# Altium PCB PCB3.PcbDoc (part 1 of 4)
Units mil, origin at the board's own origin, x right, y up, seen from the top; angles counter-clockwise.
Board outline 6000 x 4000 mil, 2 copper layers (Top Layer, Bottom Layer); 365 components, 395 nets, 1535 pads, 0 vias.
Unrouted connection lines stored in the file: 834.
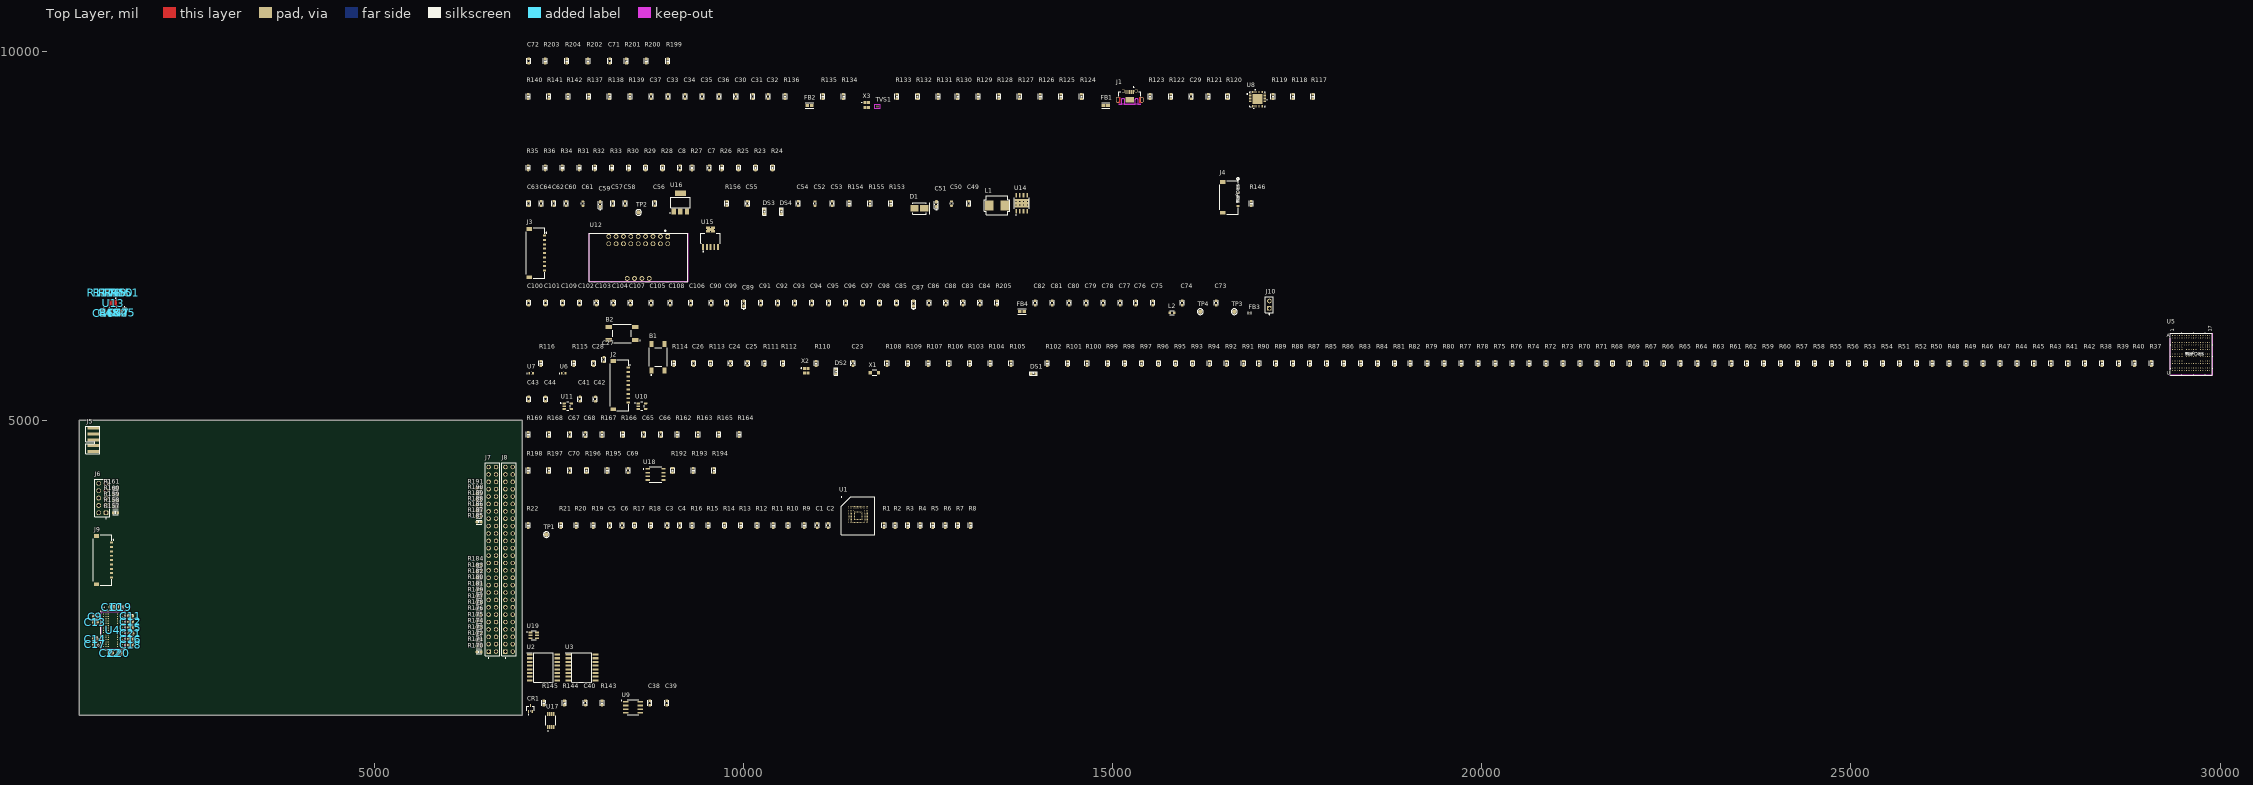
[diagram p0: Top Layer view]
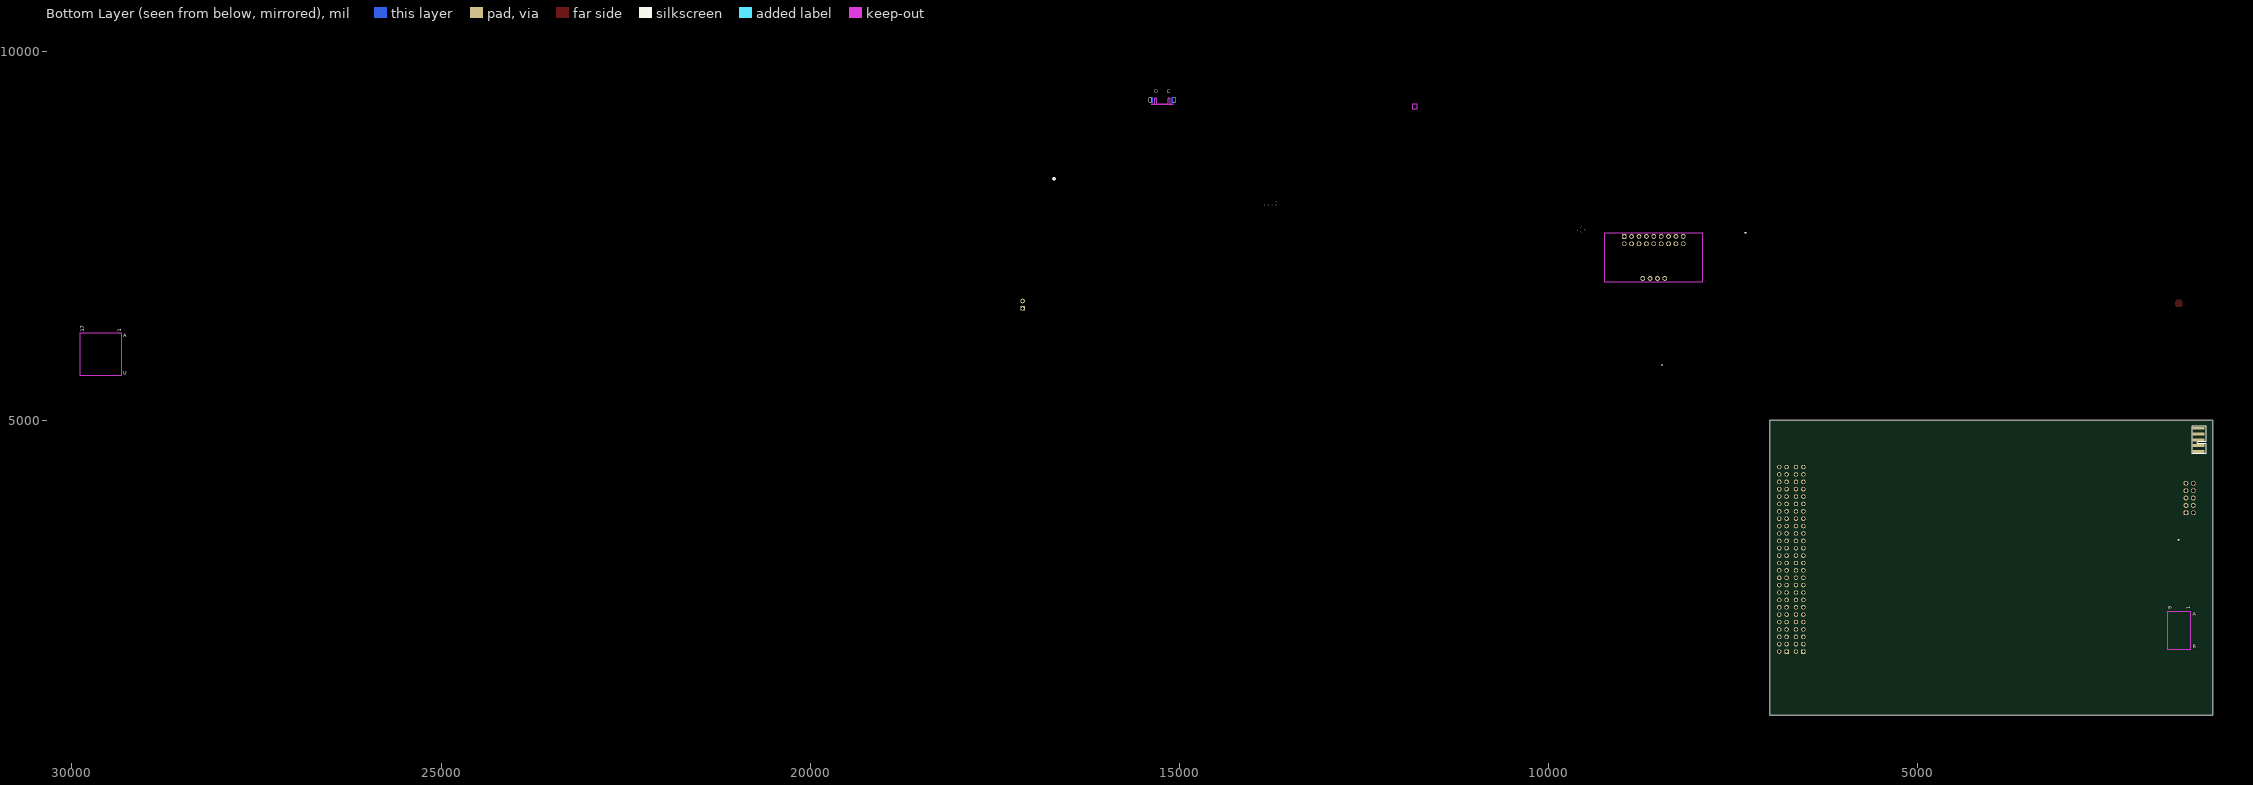
[diagram p1: Bottom Layer view, seen from below]

## Layer stack, top to bottom
Top Solder: solder mask 0.4, Solder Resist, Dk 3.5
Top Layer: signal copper 1.4
Dielectric 1: dielectric 12.6, FR-4, Dk 4.8
Bottom Layer: signal copper 1.4
Bottom Solder: solder mask 0.4, Solder Resist, Dk 3.5

## Board outline
1000,1000 7000,1000 7000,5000 1000,5000

## Design rules (kind name [scope] priority, off if disabled: settings)
Clearance [All] p1: gap=10 ignorepadtopadclearanceinfootprint=FALSE
DiffPairsRouting [All] p1: maxlimit=10 minlimit=10 mostfreqgap=10 toplayer_minwidth=15 toplayer_maxwidth=15 toplayer_prefwidth=15 bottomlayer_minwidth=15 bottomlayer_maxwidth=15 bottomlayer_prefwidth=15 maxuncoupledlength=500
MatchedLengths "Schematic Matched Net Lengths_21" [InNetClass('SDRAM_A[0..11]')] p1: tolerance=100 checknetsindiffpair=FALSE checkdiffpairvsdiffpair=TRUE checkxsignals=TRUE checkothers=TRUE
MatchedLengths "Schematic Matched Net Lengths_20" [InNet('SDIO1_CMD')] p2: tolerance=100 checknetsindiffpair=FALSE checkdiffpairvsdiffpair=TRUE checkxsignals=TRUE checkothers=TRUE
MatchedLengths "Schematic Matched Net Lengths_17" [InNet('QSPI_BK2_IO1')] p3: tolerance=100 checknetsindiffpair=FALSE checkdiffpairvsdiffpair=TRUE checkxsignals=TRUE checkothers=TRUE
MatchedLengths "Schematic Matched Net Lengths_16" [InNet('QSPI_BK2_IO3')] p4: tolerance=100 checknetsindiffpair=FALSE checkdiffpairvsdiffpair=TRUE checkxsignals=TRUE checkothers=TRUE
MatchedLengths "Schematic Matched Net Lengths_15" [InNet('QSPI_BK2_NCS')] p5: tolerance=100 checknetsindiffpair=FALSE checkdiffpairvsdiffpair=TRUE checkxsignals=TRUE checkothers=TRUE
MatchedLengths "Schematic Matched Net Lengths_13" [InNet('QSPI_BK2_IO0')] p6: tolerance=100 checknetsindiffpair=FALSE checkdiffpairvsdiffpair=TRUE checkxsignals=TRUE checkothers=TRUE
MatchedLengths "Schematic Matched Net Lengths_11" [InNet('QSPI_BK1_IO1')] p7: tolerance=100 checknetsindiffpair=FALSE checkdiffpairvsdiffpair=TRUE checkxsignals=TRUE checkothers=TRUE
MatchedLengths "Schematic Matched Net Lengths_10" [InNetClass('SDIO1_D[0..7]')] p8: tolerance=100 checknetsindiffpair=FALSE checkdiffpairvsdiffpair=TRUE checkxsignals=TRUE checkothers=TRUE
MatchedLengths "Schematic Matched Net Lengths_9" [InNet('QSPI_BK1_IO2')] p9: tolerance=100 checknetsindiffpair=FALSE checkdiffpairvsdiffpair=TRUE checkxsignals=TRUE checkothers=TRUE
MatchedLengths "Schematic Matched Net Lengths_8" [InNet('SDIO1_CK')] p10: tolerance=100 checknetsindiffpair=FALSE checkdiffpairvsdiffpair=TRUE checkxsignals=TRUE checkothers=TRUE
MatchedLengths "Schematic Matched Net Lengths_7" [InNet('QSPI_BK1_IO3')] p11: tolerance=100 checknetsindiffpair=FALSE checkdiffpairvsdiffpair=TRUE checkxsignals=TRUE checkothers=TRUE
MatchedLengths "Schematic Matched Net Lengths_6" [InNet('QSPI_BK1_NCS')] p12: tolerance=100 checknetsindiffpair=FALSE checkdiffpairvsdiffpair=TRUE checkxsignals=TRUE checkothers=TRUE
MatchedLengths "Schematic Matched Net Lengths_5" [InNet('QSPI_BK2_IO2')] p13: tolerance=100 checknetsindiffpair=FALSE checkdiffpairvsdiffpair=TRUE checkxsignals=TRUE checkothers=TRUE
MatchedLengths "Schematic Matched Net Lengths_4" [InNet('QSPI_CLK')] p14: tolerance=100 checknetsindiffpair=FALSE checkdiffpairvsdiffpair=TRUE checkxsignals=TRUE checkothers=TRUE
MatchedLengths "Schematic Matched Net Lengths_3" [InNet('QSPI_BK1_IO0')] p15: tolerance=100 checknetsindiffpair=FALSE checkdiffpairvsdiffpair=TRUE checkxsignals=TRUE checkothers=TRUE
PolygonConnect [All] p1: connectstyle=Relief reliefconductorwidth=10 reliefentries=4 polygonreliefangle="90 Angle" airgapwidth=10
RoutingVias [All] p1: holewidth=28 width=50 viastyle="Through Hole" minholewidth=28 minwidth=50 maxholewidth=28 maxwidth=50
SolderMaskExpansion [All] p1: expansion=4 istentingtop=FALSE
SupplyNets "Schematic Supply Nets_23" [InNet('5V')] p1: voltage=0.000
SupplyNets "Schematic Supply Nets_22" [InNet('VBUS')] p2: voltage=0.000
SupplyNets "Schematic Supply Nets_21" [InNet('12V_CONN')] p3: voltage=0.000
SupplyNets "Schematic Supply Nets_20" [InNet('5V_SW3')] p4: voltage=0.000
SupplyNets "Schematic Supply Nets_18" [InNet('3V3_BUS')] p5: voltage=0.000
SupplyNets "Schematic Supply Nets_17" [InNet('VBAT_BUS')] p6: voltage=0.000
SupplyNets "Schematic Supply Nets_16" [InNet('VDDA')] p7: voltage=0.000
SupplyNets "Schematic Supply Nets_15" [InNet('3V3_SW3')] p8: voltage=0.000
SupplyNets "Schematic Supply Nets_14" [InNet('3V3_SW1')] p9: voltage=0.000
SupplyNets "Schematic Supply Nets_13" [InNet('5V_BUS')] p10: voltage=0.000
SupplyNets "Schematic Supply Nets_11" [InNet('GND')] p11: voltage=0.000
SupplyNets "Schematic Supply Nets_10" [InNet('VDD_SDC')] p12: voltage=0.000
SupplyNets "Schematic Supply Nets_9" [InNet('3.3V')] p13: voltage=0.000
SupplyNets "Schematic Supply Nets_8" [InNet('5V_SW1')] p14: voltage=0.000
SupplyNets "Schematic Supply Nets_7" [InNet('5V_SW2')] p15: voltage=0.000
SupplyNets "Schematic Supply Nets_6" [InNet('VDD_MCU')] p16: voltage=0.000
SupplyNets "Schematic Supply Nets_5" [InNet('3V3_SW2')] p17: voltage=0.000
SupplyNets "Schematic Supply Nets_4" [InNet('12V')] p18: voltage=0.000
SupplyNets "Schematic Supply Nets_3" [InNet('3V3')] p19: voltage=0.000
SupplyNets "Schematic Supply Nets_2" [InNet('1V8')] p20: voltage=0.000
SupplyNets "Schematic Supply Nets" [InNet('GND-SD')] p21: voltage=0.000
Width [All] p1: maxlimit=10 minlimit=10 preferedwidth=10
29 further rules are at their usual default settings.

## Classes and differential pairs
component class USB_HS_DEVICE: C29 C30 C31 C32 C33 C34 C35 C36 FB1 FB2 J1 R117 R118 R119 R120 R121 R122 R123 R124 R125 R126 R127 R128 R129 R130 R131 R132 R133 R134 R135 R136 R137 R138 R139 R140 R141 R142 TVS1 U8 X3
net class ULPI_D[0..7]: ULPI_D0 ULPI_D1 ULPI_D2 ULPI_D3 ULPI_D4 ULPI_D5 ULPI_D6 ULPI_D7
net class SDRAM_D[0..31]: SDRAM_D0 SDRAM_D1 SDRAM_D2 SDRAM_D3 SDRAM_D4 SDRAM_D5 SDRAM_D6 SDRAM_D7 SDRAM_D8 SDRAM_D9 SDRAM_D10 SDRAM_D11 SDRAM_D12 SDRAM_D13 SDRAM_D14 SDRAM_D15 SDRAM_D16 SDRAM_D17 SDRAM_D18 SDRAM_D19 SDRAM_D20 SDRAM_D21 SDRAM_D22 SDRAM_D23 SDRAM_D24 SDRAM_D25 SDRAM_D26 SDRAM_D27 SDRAM_D28 SDRAM_D29 SDRAM_D30 SDRAM_D31
net class SDRAM_A[0..11]: SDRAM_A0 SDRAM_A1 SDRAM_A2 SDRAM_A3 SDRAM_A4 SDRAM_A5 SDRAM_A6 SDRAM_A7 SDRAM_A8 SDRAM_A9 SDRAM_A10 SDRAM_A11
net class SDIO1_D[0..7]: SDIO1_D0 SDIO1_D1 SDIO1_D2 SDIO1_D3 SDIO1_D4 SDIO1_D5 SDIO1_D6 SDIO1_D7
net class N000-2_[0..9]: FPGA_D0 FPGA_D1 FPGA_D2 FPGA_D3 FPGA_D4 FPGA_D5 FPGA_D6 FPGA_D7 FPGA_D8 FPGA_D9
net class N000-1_[0..4]: FPGA_STATUS0 FPGA_STATUS1 FPGA_STATUS2 FPGA_STATUS3 FPGA_STATUS4
component class WATCHDOG: C90 C104 R199 R200 R201 R202 R203 R204 U19
component class SDRAM: C9 C10 C11 C12 C13 C14 C15 C16 C17 C18 C19 C20 C21 C22 U4
component class QSPI: C7 C8 R23 R24 R25 R26 R27 R28 R29 R30 R31 R32 R33 R34 R35 R36 U2 U3
component class POWER: C45 C46 C47 C48 C49 C50 C51 C52 C54 C55 C56 C60 C86 C89 C104 C105 C109 D1 DS3 DS4 J4 L1 R146 R147 R148 R149 R150 R151 R152 R153 R154 R156 TP2 U13 U14 U16
component class MODULE_FPGA: J3 U12
component class MCU: B1 B2 C23 C24 C25 C26 C27 C28 DS1 DS2 R38 R39 R40 R42 R43 R44 R46 R48 R50 R51 R52 R54 R56 R57 R58 R59 R60 R61 R62 R63 R64 R65 R66 R67 R68 R69 R70 R71 R72 R73 R74 R75 R76 R77 R78 R79 R80 R81 R82 R83 R84 R85 R86 R87 R88 R89 R90 R91 R92 R93 R94 R95 R96 R97 R98 R99 R100 R101 R102 R103 R104 R105 R106 R107 R108 R109 R110 R111 R112 R113 R114 R115 R116 U5 U6 U7 X1 X2
component class MCU_POWER: C86 C89 C90 C102 C104 C105 C106 C107 C108 C109 FB3 FB4 HW1 J10 L2 R205 TP3 TP4
component class LVDS: C41 C42 C43 C44 J2 U10 U11
component class I2C: C86 C90 C104 C109 R162 R163 R164 R166 R167 R168 R169 U18
component class FRAM: C89 C105 R192 R193 R194 R195 R196 R197 R198 U18
component class eMMC: C1 C2 C3 C4 C5 C6 R1 R2 R3 R4 R5 R6 R7 R8 R9 R10 R11 R12 R13 R14 R15 R16 R17 R18 R19 R20 R21 R22 TP1 U1
component class DEBUG: J5 J6 R157 R158 R159 R160 R161
component class CONNECTOR: J7 J8 R170 R171 R172 R173 R174 R175 R176 R177 R178 R179 R180 R181 R182 R183 R184 R185 R186 R187 R188 R189 R190 R191
component class CONNECT_EXP: J9
component class CAN: C38 C39 C40 CR1 R143 R144 R145 U9
differential pair FPGA_TxD: +FPGA_TxD_P -FPGA_TxD_N
differential pair FPGA_TxC: +FPGA_TxC_P -FPGA_TxC_N
differential pair USB_HS: +USB_HS_P -USB_HS_N
differential pair LVDS_TxD: +LVDS_TxD_P -LVDS_TxD_N
differential pair LVDS_TxC: +LVDS_TxC_P -LVDS_TxC_N

## Components (designator, comment, footprint, x,y, rotation, side; value= is the part's Value field where it differs from the comment)
B1 "4-1437565-1" FP-4-1437565-1-MFG 8840,5855 r90 top
B2 "4-1437565-1" FP-4-1437565-1-MFG 8350,6175 r180 top
C1 "100nF/16V" CAP_C_1608X80 10995,3575 r90 top value=33pF
C2 "2.2uF/10V" CAP_C_1608X80 11145,3575 r90 top value=33pF
C3 "100nF/16V" CAP_C_1608X80 8965,3575 r90 top value=33pF
C4 "2.2uF/10V" CAP_C_1608X80 9135,3575 r90 top value=33pF
C5 "100nF/16V" CAP_C_1608X80 8185,3575 r90 top value=33pF
C6 "2.2uF/10V" CAP_C_1608X80 8355,3575 r90 top value=33pF
C7 "100nF/16V" CAP_C_1608X80 9535,8420 r90 top value=33pF
C8 "100nF/16V" CAP_C_1608X80 9135,8420 r90 top value=33pF
C9 "100nF/16V" CAP_C_1608X80 1214.8,2335.76 r0 top value=33pF
C10 "100nF/16V" CAP_C_1608X80 1441.78,2464.45 r0 top value=33pF
C11 "100nF/16V" CAP_C_1608X80 1692.28,2345.81 r180 top value=33pF
C12 "100nF/16V" CAP_C_1608X80 1692.28,2268 r180 top value=33pF
C13 "100nF/16V" CAP_C_1608X80 1214.8,2265.56 r0 top value=33pF
C14 "100nF/16V" CAP_C_1608X80 1214.8,2035.5 r0 top value=33pF
C15 "100nF/16V" CAP_C_1608X80 1692.28,2190.18 r180 top value=33pF
C16 "100nF/16V" CAP_C_1608X80 1692.28,2034.55 r180 top value=33pF
C17 "100nF/16V" CAP_C_1608X80 1214.8,1963.33 r0 top value=33pF
C18 "100nF/16V" CAP_C_1608X80 1692.28,1956.74 r180 top value=33pF
C19 "100nF/16V" CAP_C_1608X80 1564.18,2464.45 r180 top value=33pF
C20 "100nF/16V" CAP_C_1608X80 1541.94,1842.41 r180 top value=33pF
C21 "100nF/16V" CAP_C_1608X80 1695.27,2112.37 r180 top value=33pF
C22 "100nF/16V" CAP_C_1608X80 1419.73,1841.26 r0 top value=33pF
C23 "10nF/16V" CAP_C_1608X80 11480,5770 r90 top value=33pF
C24 "1.5pF/50V" CAP_C_1608X80 9820,5770 r90 top value=33pF
C25 "1.5pF/50V" CAP_C_1608X80 10050,5770 r90 top value=33pF
C26 "100nF/16V" CAP_C_1608X80 9320,5770 r90 top value=33pF
C27 "1.5pF/50V" CAP_C_1608X80 8105,5820.51 r90 top value=33pF
C28 "100nF/16V" CAP_C_1608X80 7965,5770 r90 top value=33pF
C29 "100nF/16V" CAP_C_1608X80 16065,9385 r90 top value=33pF
C30 "100nF/16V" CAP_C_1608X80 9895,9385 r90 top value=33pF
C31 "100nF/16V" CAP_C_1608X80 10120,9385 r90 top value=33pF
C32 "100nF/16V" CAP_C_1608X80 10330,9385 r90 top value=33pF
C33 "100nF/16V" CAP_C_1608X80 8975,9385 r90 top value=33pF
C34 "100nF/16V" CAP_C_1608X80 9205,9385 r90 top value=33pF
C35 "2.2uF/10V" CAP_C_1608X80 9435,9385 r90 top value=33pF
C36 "100nF/16V" CAP_C_1608X80 9665,9385 r90 top value=33pF
C37 "100nF/16V" CAP_C_1608X80 8745,9385 r90 top value=33pF
C38 "100nF/16V" CAP_C_1608X80 8725,1170 r90 top value=33pF
C39 "100nF/16V" CAP_C_1608X80 8955,1170 r90 top value=33pF
C40 "4.7nF/16V" CAP_C_1608X80 7855,1170 r90 top value=33pF
C41 "10uF/16V" CAP_C_1608X80 7780,5285 r90 top value=33pF
C42 "1uF/16V" CAP_C_1608X80 7990,5285 r90 top value=33pF
C43 "10uF/16V" CAP_C_1608X80 7085,5285 r90 top value=33pF
C44 "1uF/16V" CAP_C_1608X80 7315,5285 r90 top value=33pF
C45 "33uF/16V" CAP_MP_1608X90 1612.06,6458.38 r270 top
C46 "33uF/16V" CAP_MP_1608X90 1331.7,6450.03 r270 top
C47 "2.2nF/25V" CAP_C_1608X80 1542.02,6455 r90 top
C48 "2.2nF/25V" CAP_C_1608X80 1401.74,6455.83 r90 top
C49 "0.01uF/16V" CAP_C_1608X80 13050,7935 r90 top value=33pF
C50 "0.22uF/16V" CAP_C_1608X80_L 12815,7935 r90 top value=33pF
C51 "33uF/16V" CAP_MP_1608X90 12610,7925 r90 top
C52 "0.22uF/16V" CAP_C_1608X80_L 10965,7935 r90 top value=33pF
C53 "0.22uF/10V" CAP_C_1608X80 11200,7935 r90 top value=33pF
C54 "0.22uF/10V" CAP_C_1608X80 10740,7935 r90 top value=33pF
C55 "0.22uF/10V" CAP_C_1608X80 10050,7935 r90 top value=33pF
C56 "0.22uF/10V" CAP_C_1608X80 8795,7935 r90 top value=33pF
C57 "0.22uF/10V" CAP_C_1608X80 8225,7935 r90 top value=33pF
C58 "0.22uF/10V" CAP_C_1608X80 8395,7935 r90 top value=33pF
C59 "33uF/16V" CAP_MP_1608X90 8055,7925 r90 top
C60 "0.22uF/10V" CAP_C_1608X80 7595,7935 r90 top value=33pF
C61 "10uF/25V" CAP_C_1608X80_L 7820,7935 r90 top value=33pF
C62 "0.22uF/10V" CAP_C_1608X80 7425,7935 r90 top value=33pF
C63 "0.22uF/10V" CAP_C_1608X80 7085,7935 r90 top value=33pF
C64 "0.22uF/10V" CAP_C_1608X80 7255,7935 r90 top value=33pF
C65 "1uF/16V" CAP_C_1608X80 8645,4805 r90 top value=33pF
C66 "0.22uF" CAP_C_1608X80 8875,4805 r90 top value=33pF
C67 "1uF/16V" CAP_C_1608X80 7645,4805 r90 top value=33pF
C68 "0.22uF" CAP_C_1608X80 7855,4805 r90 top value=33pF
C69 "0.22uF/10V" CAP_C_1608X80 8435,4320 r90 top value=33pF
C70 "0.22uF/10V" CAP_C_1608X80 7645,4320 r90 top value=33pF
C71 "220nF/10V" CAP_C_1608X80 8185,9865 r90 top value=33pF
C72 "220nF/10V" CAP_C_1608X80 7085,9865 r90 top value=33pF
C73 "10uF/6V3" CAP_C_1608X80 16400,6590 r90 top value=33pF
C74 "220pF/16V" CAP_C_1608X80 15940,6590 r90 top value=33pF
C75 "10uF/6V3" CAP_C_1608X80 15540,6590 r90 top value=33pF
C76 "4.7uF/6V3" CAP_C_1608X80 15310,6590 r90 top value=33pF
C77 "4.7uF/6V3" CAP_C_1608X80 15100,6590 r90 top value=33pF
C78 "4.7uF/6V3" CAP_C_1608X80 14870,6590 r90 top value=33pF
C79 "2.2uF/10V" CAP_C_1608X80 14640,6590 r90 top value=33pF
C80 "2.2uF/10V" CAP_C_1608X80 14410,6590 r90 top value=33pF
C81 "2.2uF/10V" CAP_C_1608X80 14180,6590 r90 top value=33pF
C82 "1uF/16V" CAP_C_1608X80 13950,6590 r90 top value=33pF
C83 "2.2uF/10V" CAP_C_1608X80 12970,6590 r90 top value=33pF
C84 "100nF/16V" CAP_C_1608X80 13200,6590 r90 top value=33pF
C85 "10uF/16V" CAP_C_1608X80 12070,6590 r90 top value=33pF
C86 "100nF/16V" CAP_C_1608X80 12510,6590 r90 top value=33pF
C87 "1uF/35V" CAP_MP_1608X90 12300,6580 r90 top
C88 "100nF/16V" CAP_C_1608X80 12740,6590 r90 top value=33pF
C89 "4.7uF/16V" CAP_MP_1608X90 10000,6580 r90 top
C90 "100nF/16V" CAP_C_1608X80 9560,6590 r90 top value=33pF
C91 "100nF/16V" CAP_C_1608X80 10230,6590 r90 top value=33pF
C92 "100nF/16V" CAP_C_1608X80 10460,6590 r90 top value=33pF
C93 "100nF/16V" CAP_C_1608X80 10690,6590 r90 top value=33pF
C94 "100nF/16V" CAP_C_1608X80 10920,6590 r90 top value=33pF
C95 "100nF/16V" CAP_C_1608X80 11150,6590 r90 top value=33pF
C96 "100nF/16V" CAP_C_1608X80 11380,6590 r90 top value=33pF
C97 "100nF/16V" CAP_C_1608X80 11610,6590 r90 top value=33pF
C98 "100nF/16V" CAP_C_1608X80 11840,6590 r90 top value=33pF
C99 "100nF/16V" CAP_C_1608X80 9770,6590 r90 top value=33pF
C100 "100nF/16V" CAP_C_1608X80 7085,6590 r90 top value=33pF
C101 "100nF/16V" CAP_C_1608X80 7315,6590 r90 top value=33pF
C102 "100nF/16V" CAP_C_1608X80 7775,6590 r90 top value=33pF
C103 "100nF/16V" CAP_C_1608X80 8005,6590 r90 top value=33pF
C104 "100nF/16V" CAP_C_1608X80 8235,6590 r90 top value=33pF
C105 "100nF/16V" CAP_C_1608X80 8745,6590 r90 top value=33pF
C106 "100nF/16V" CAP_C_1608X80 9280,6590 r90 top value=33pF
C107 "100nF/16V" CAP_C_1608X80 8465,6590 r90 top value=33pF
C108 "100nF/16V" CAP_C_1608X80 9005,6590 r90 top value=33pF
C109 "100nF/16V" CAP_C_1608X80 7545,6590 r90 top value=33pF
CR1 "ESDCAN02-2BWY" SOT323-3L_STM 7110,1095 r0 top
D1 "SS54B" JCET-SMB-2_M 12380,7870 r0 top
DS1 "LED_green" LED-0603-GREEN 13925,5635 r0 top value=GREEN
DS2 "LED_red" LED-0603-RED 11250,5660 r90 top value=RED
DS3 "LED_red" LED-0603-RED 10280,7825 r90 top value=RED
DS4 "LED_green" LED-0603-GREEN 10510,7825 r90 top value=GREEN
FB1 "BLM18PG121SN1D" FP-BLM18-0_15-t0_8-IPC_A 14905,9265 r0 top
FB2 "BLM18PG121SN1D" FP-BLM18-0_15-t0_8-IPC_A 10890,9265 r0 top
FB3 "BLM03PG330SN1D" FP-BLM03-0_03-d0_3-IPC_C 16855,6450 r90 top
FB4 "BLM18KG601SN1D" FP-BLM18-0_15-t0_8-IPC_A 13770,6470 r0 top
J1 "47590-0001" MOLEX_47590-0001 15230,9340 r0 top
J2 "5040500991" 5040500991 8315,5475 r90 top
J3 "5040500991" 5040500991 7180,7265 r90 top
J4 "5040500591" CONN_5040500591_MOL 16575,8020 r90 top
J5 "009159010061911" 009159010061911 1190,4576.26 r90 top
J6 "61301021121" 61301021121 1310,3945 r90 top
J7 "ESQ-126-14-G-D" ESQ-126-14-G-D 6593.46,3115.45 r270 top
J8 "ESQ-126-14-G-D" ESQ-126-14-G-D 6820,3115.45 r270 top
J9 "5040500991" 5040500991 1315,3105 r90 top
J10 "TSW-102-07-G-S" FP-TSW-102-07-G-S-MFG 17120,6565 r90 top
L1 "SRP7050TA-220M" SRP7050TA-220M 13430,7910 r0 top
L2 "10uH" INDC1608X95N 15800,6455 r0 top
R1 "47k" RES_C_1608X60 11900,3575 r90 top
R2 "47k" RES_C_1608X60 12050,3575 r90 top
R3 "47k" RES_C_1608X60 12220,3575 r90 top
R4 "47k" RES_C_1608X60 12390,3575 r90 top
R5 "47k" RES_C_1608X60 12560,3575 r90 top
R6 "47k" RES_C_1608X60 12730,3575 r90 top
R7 "47k" RES_C_1608X60 12900,3575 r90 top
R8 "47k" RES_C_1608X60 13070,3575 r90 top
R9 "22R" RES_C_1608X60 10820,3575 r90 top
R10 "22R" RES_C_1608X60 10600,3575 r90 top
R11 "22R" RES_C_1608X60 10400,3575 r90 top
R12 "22R" RES_C_1608X60 10180,3575 r90 top
R13 "22R" RES_C_1608X60 9960,3575 r90 top
R14 "22R" RES_C_1608X60 9740,3575 r90 top
R15 "22R" RES_C_1608X60 9520,3575 r90 top
R16 "22R" RES_C_1608X60 9300,3575 r90 top
R17 "47k" RES_C_1608X60 8520,3575 r90 top
R18 "10k" RES_C_1608X60 8740,3575 r90 top
R19 "0R" RES_C_1608X60 7960,3575 r90 top
R20 "22R" RES_C_1608X60 7730,3575 r90 top
R21 "22R" RES_C_1608X60 7520,3575 r90 top
R22 "47k" RES_C_1608X60 7080,3575 r90 top
R23 "33R" RES_C_1608X60 10160,8420 r90 top
R24 "33R" RES_C_1608X60 10390,8420 r90 top
R25 "33R" RES_C_1608X60 9930,8420 r90 top
R26 "33R" RES_C_1608X60 9700,8420 r90 top
R27 "33R" RES_C_1608X60 9300,8420 r90 top
R28 "33R" RES_C_1608X60 8900,8420 r90 top
R29 "33R" RES_C_1608X60 8670,8420 r90 top
R30 "33R" RES_C_1608X60 8440,8420 r90 top
R31 "33R" RES_C_1608X60 7770,8420 r90 top
R32 "33R" RES_C_1608X60 7980,8420 r90 top
R33 "33R" RES_C_1608X60 8210,8420 r90 top
R34 "33R" RES_C_1608X60 7540,8420 r90 top
R35 "10k" RES_C_1608X60 7080,8420 r90 top
R36 "10k" RES_C_1608X60 7310,8420 r90 top
R37 "33R" RES_C_1608X60 29070,5770 r90 top
R38 "33R" RES_C_1608X60 28400,5770 r90 top
R39 "33R" RES_C_1608X60 28630,5770 r90 top
R40 "33R" RES_C_1608X60 28840,5770 r90 top
R41 "33R" RES_C_1608X60 27940,5770 r90 top
R42 "33R" RES_C_1608X60 28170,5770 r90 top
R43 "33R" RES_C_1608X60 27710,5770 r90 top
R44 "33R" RES_C_1608X60 27250,5770 r90 top
R45 "33R" RES_C_1608X60 27480,5770 r90 top
R46 "33R" RES_C_1608X60 26790,5770 r90 top
R47 "33R" RES_C_1608X60 27020,5770 r90 top
R48 "33R" RES_C_1608X60 26330,5770 r90 top
R49 "33R" RES_C_1608X60 26560,5770 r90 top
R50 "33R" RES_C_1608X60 26100,5770 r90 top
R51 "33R" RES_C_1608X60 25660,5770 r90 top
R52 "33R" RES_C_1608X60 25890,5770 r90 top
R53 "33R" RES_C_1608X60 25200,5770 r90 top
R54 "33R" RES_C_1608X60 25430,5770 r90 top
R55 "33R" RES_C_1608X60 24740,5770 r90 top
R56 "33R" RES_C_1608X60 24970,5770 r90 top
R57 "33R" RES_C_1608X60 24280,5770 r90 top
R58 "33R" RES_C_1608X60 24510,5770 r90 top
R59 "33R" RES_C_1608X60 23820,5770 r90 top
R60 "33R" RES_C_1608X60 24050,5770 r90 top
R61 "33R" RES_C_1608X60 23380,5770 r90 top
R62 "33R" RES_C_1608X60 23590,5770 r90 top
R63 "33R" RES_C_1608X60 23150,5770 r90 top
R64 "33R" RES_C_1608X60 22920,5770 r90 top
R65 "33R" RES_C_1608X60 22690,5770 r90 top
R66 "33R" RES_C_1608X60 22460,5770 r90 top
R67 "33R" RES_C_1608X60 22230,5770 r90 top
R68 "33R" RES_C_1608X60 21770,5770 r90 top
R69 "33R" RES_C_1608X60 22000,5770 r90 top
R70 "33R" RES_C_1608X60 21330,5770 r90 top
R71 "33R" RES_C_1608X60 21560,5770 r90 top
R72 "33R" RES_C_1608X60 20870,5770 r90 top
R73 "33R" RES_C_1608X60 21100,5770 r90 top
R74 "33R" RES_C_1608X60 20640,5770 r90 top
R75 "33R" RES_C_1608X60 20180,5770 r90 top
R76 "33R" RES_C_1608X60 20410,5770 r90 top
R77 "33R" RES_C_1608X60 19720,5770 r90 top
R78 "33R" RES_C_1608X60 19950,5770 r90 top
R79 "33R" RES_C_1608X60 19260,5770 r90 top
R80 "33R" RES_C_1608X60 19490,5770 r90 top
R81 "33R" RES_C_1608X60 18820,5770 r90 top
R82 "33R" RES_C_1608X60 19030,5770 r90 top
R83 "33R" RES_C_1608X60 18360,5770 r90 top
R84 "33R" RES_C_1608X60 18590,5770 r90 top
R85 "33R" RES_C_1608X60 17900,5770 r90 top
R86 "33R" RES_C_1608X60 18130,5770 r90 top
R87 "33R" RES_C_1608X60 17670,5770 r90 top
R88 "33R" RES_C_1608X60 17440,5770 r90 top
R89 "33R" RES_C_1608X60 17210,5770 r90 top
R90 "33R" RES_C_1608X60 16980,5770 r90 top
R91 "33R" RES_C_1608X60 16770,5770 r90 top
R92 "33R" RES_C_1608X60 16540,5770 r90 top
R93 "33R" RES_C_1608X60 16080,5770 r90 top
R94 "51R" RES_C_1608X60 16310,5770 r90 top
R95 "33R" RES_C_1608X60 15850,5770 r90 top
R96 "33R" RES_C_1608X60 15620,5770 r90 top
R97 "33R" RES_C_1608X60 15390,5770 r90 top
R98 "33R" RES_C_1608X60 15160,5770 r90 top
R99 "33R" RES_C_1608X60 14930,5770 r90 top
R100 "33R" RES_C_1608X60 14650,5770 r90 top
R101 "33R" RES_C_1608X60 14390,5770 r90 top
R102 "33R" RES_C_1608X60 14110,5770 r90 top
R103 "0R" RES_C_1608X60 13060,5770 r90 top
R104 "0R" RES_C_1608X60 13340,5770 r90 top
R105 "33R" RES_C_1608X60 13620,5770 r90 top
R106 "1k" RES_C_1608X60 12780,5770 r90 top
R107 "1k" RES_C_1608X60 12500,5770 r90 top
R108 "10k" RES_C_1608X60 11940,5770 r90 top
R109 "10k (DNP)" RES_C_1608X60 12220,5770 r90 top
R110 "1k" RES_C_1608X60 10980,5770 r90 top
R111 "10k" RES_C_1608X60 10280,5770 r90 top
R112 "10k" RES_C_1608X60 10530,5770 r90 top
R113 "10k" RES_C_1608X60 9550,5770 r90 top
R114 "100R" RES_C_1608X60 9050,5770 r90 top
R115 "330R" RES_C_1608X60 7695,5770 r90 top
R116 "220k" RES_C_1608X60 7250,5770 r90 top
R117 "0R" RES_C_1608X60 17710,9385 r90 top
R118 "0R" RES_C_1608X60 17440,9385 r90 top
R119 "0R" RES_C_1608X60 17170,9385 r90 top
R120 "0R" RES_C_1608X60 16555,9385 r90 top
R121 "0R" RES_C_1608X60 16295,9385 r90 top
R122 "0R" RES_C_1608X60 15785,9385 r90 top
R123 "33R" RES_C_1608X60 15505,9385 r90 top
R124 "8.06k" RES_C_1608X60 14575,9385 r90 top
R125 "10k 1%" RES_C_1608X60 14295,9385 r90 top
R126 "0R" RES_C_1608X60 14015,9385 r90 top
R127 "0R" RES_C_1608X60 13735,9385 r90 top
R128 "0R" RES_C_1608X60 13455,9385 r90 top
R129 "0R" RES_C_1608X60 13175,9385 r90 top
R130 "0R" RES_C_1608X60 12895,9385 r90 top
R131 "0R" RES_C_1608X60 12635,9385 r90 top
R132 "0R" RES_C_1608X60 12355,9385 r90 top
R133 "0R" RES_C_1608X60 12075,9385 r90 top
R134 "51R" RES_C_1608X60 11350,9385 r90 top
R135 "10k" RES_C_1608X60 11070,9385 r90 top
R136 "4.7k" RES_C_1608X60 10560,9385 r90 top
R137 "0R" RES_C_1608X60 7900,9385 r90 top
R138 "0R" RES_C_1608X60 8180,9385 r90 top
R139 "0R" RES_C_1608X60 8460,9385 r90 top
R140 "0R (DNP)" RES_C_1608X60 7080,9385 r90 top
R141 "0R (DNP)" RES_C_1608X60 7360,9385 r90 top
R142 "0R (DNP)" RES_C_1608X60 7620,9385 r90 top
R143 "60R" RES_C_1608X60 8080,1170 r90 top
R144 "60R" RES_C_1608X60 7570,1170 r90 top
R145 "10k" RES_C_1608X60 7290,1170 r90 top
R146 "10k" RES_C_1608X60 16875,7935 r90 top
R147 "10k" RES_C_1608X60 1300.67,6730 r90 top
R148 "470k" RES_C_1608X60 1379.73,6730 r90 top
R149 "22R" RES_C_1608X60 1458.78,6730 r90 top
R150 "11k" RES_C_1608X60 1537.84,6730 r270 top
R151 "47k" RES_C_1608X60 1616.89,6730 r90 top
R152 "3.3k" RES_C_1608X60 1472.47,6454.39 r90 top
R153 "10k" RES_C_1608X60 11990,7935 r90 top
R154 "4.7k" RES_C_1608X60 11430,7935 r90 top
R155 "1k" RES_C_1608X60 11710,7935 r90 top
R156 "3.24k" RES_C_1608X60 9770,7935 r90 top
R157 "22R" RES_C_1608X60 1487.91,3744.51 r0 top
R158 "22R" RES_C_1608X60 1487.91,3827.5 r0 top
R159 "22R" RES_C_1608X60 1487.91,3910.5 r0 top
R160 "22R" RES_C_1608X60 1487.91,3993.49 r180 top
R161 "22R" RES_C_1608X60 1487.91,4076.49 r180 top
R162 "4.7k" RES_C_1608X60 9100,4805 r90 top
R163 "4.7k" RES_C_1608X60 9380,4805 r90 top
R164 "4.7k" RES_C_1608X60 9940,4805 r90 top
R165 "4.7k" RES_C_1608X60 9660,4805 r90 top
R166 "22R" RES_C_1608X60 8360,4805 r90 top
R167 "22R" RES_C_1608X60 8080,4805 r90 top
R168 "22R" RES_C_1608X60 7360,4805 r90 top
R169 "10k" RES_C_1608X60 7080,4805 r90 top
R170 "22R" RES_C_1608X60 6414.09,1860.35 r0 top
R171 "22R" RES_C_1608X60 6414.09,1944.21 r0 top
R172 "22R" RES_C_1608X60 6414.09,2028.08 r0 top
R173 "22R" RES_C_1608X60 6414.09,2111.95 r180 top
R174 "22R" RES_C_1608X60 6414.09,2195.82 r180 top
R175 "22R" RES_C_1608X60 6414.09,2279.69 r0 top
R176 "22R" RES_C_1608X60 6414.09,2363.56 r180 top
R177 "22R" RES_C_1608X60 6414.09,2531.29 r0 top
R178 "22R" RES_C_1608X60 6414.09,2447.43 r180 top
R179 "22R" RES_C_1608X60 6414.09,2615.16 r0 top
R180 "22R" RES_C_1608X60 6414.09,2782.9 r180 top
R181 "22R" RES_C_1608X60 6414.09,2699.03 r0 top
R182 "22R" RES_C_1608X60 6414.09,2866.77 r0 top
R183 "22R" RES_C_1608X60 6414.09,2950.64 r0 top
R184 "22R" RES_C_1608X60 6414.09,3034.5 r0 top
R185 "0R" RES_C_1608X60 6414.09,3620 r0 top
R186 "22R" RES_C_1608X60 6414.09,3773.33 r0 top
R187 "0R" RES_C_1608X60 6414.09,3696.67 r180 top
R188 "0R" RES_C_1608X60 6414.09,3850 r0 top
R189 "0R" RES_C_1608X60 6414.09,3926.67 r180 top
R190 "0R" RES_C_1608X60 6414.09,4003.33 r0 top
R191 "0R" RES_C_1608X60 6414.09,4080 r180 top
R192 "4.7k" RES_C_1608X60 9035,4320 r90 top
R193 "4.7k" RES_C_1608X60 9315,4320 r90 top
R194 "4.7k" RES_C_1608X60 9595,4320 r90 top
R195 "22R" RES_C_1608X60 8150,4320 r90 top
R196 "22R" RES_C_1608X60 7870,4320 r90 top
R197 "22R" RES_C_1608X60 7360,4320 r90 top
R198 "22R" RES_C_1608X60 7080,4320 r90 top
R199 "22R" RES_C_1608X60 8970,9865 r90 top
R200 "0R" RES_C_1608X60 8680,9865 r90 top
R201 "22R" RES_C_1608X60 8410,9865 r90 top
R202 "22R" RES_C_1608X60 7890,9865 r90 top
R203 "16.5K" RES_C_1608X60 7310,9865 r90 top
R204 "16.5K" RES_C_1608X60 7600,9865 r90 top
R205 "0R" RES_C_1608X60 13430,6590 r90 top
TP1 "Test Point" TESTPOINT 7325,3450 r0 top value=N/A
TP2 "Test Point" TESTPOINT 8575,7815 r0 top
TP3 "Test Point" TESTPOINT 16645,6470 r0 top
TP4 "Test Point" TESTPOINT 16185,6470 r0 top
TVS1 "USBULC6-2F3" FLIPCHIP4_USBUL_STM 11810,9250 r90 top
U1 "THGBMTG5D1LBAIL" BGA153C50P14X14_1150X1300X80 11550,3705 r0 top
U2 "MT25QL512ABB1ESF-0SIT" SOIC127P1032X265-16N 7285,1650 r0 top
U3 "MT25QL512ABB1ESF-0SIT" SOIC127P1032X265-16N 7805,1650 r0 top
U4 "IS42S32400F-6BL" TFBGA-90_8X13_ISI 1453.4,2153.43 r0 top value=IS42S32400J-6BL
U5 "" TFBGA240+25 29610,5895 r0 top value=STM32H745XIH6
U6 "ESD-TRANSIL" TVS_ESDA7P60-1U1M 7560,5635 r0 top value=ESDA7P60-1U1M
U7 "ESD-TRANSIL" TVS_ESDA7P60-1U1M 7120,5635 r0 top value=ESDA7P60-1U1M
U8 "USB3320C-EZK" QFN32_5X5MC_MCH 16960,9350 r0 top
U9 "SN65HVD230DR" SOIC127P599X175-8N 8500,1110 r0 top
U10 "DS90LV011AQ-Q1" DS90LV011AQ-Q1 8620,5190 r0 top
U11 "DS90LV011AQ-Q1" DS90LV011AQ-Q1 7615,5190 r0 top
U12 "Module_FPGA_V1" MODULE_FPGA 8910,7210 r180 top
U13 "TPS259470ARPWR" IC_TPS25974ARPWR 1456.33,6581.22 r270 top
U14 "TPS5430DDAR" CONV_TPS5430DDAR 13765,7940 r90 top
U15 "TPS7A4533DCQR" DCQ0006A-MFG 9550,7465 r90 top
U16 "" SOT230P700X180-4N 9140,7950 r0 top value=LD1117S18TR
U17 "PCA9508DP,118" TSSOP8_SOT505-1_NXP 7385,930 r90 top
U18 "IS66WVS4M8BLL-104NLI" SOIC8_150MIL_N_ISI 8805,4265 r0 top
U19 "TPL5015DDCR" TPL5010DDCR 7155,2085 r0 top
X1 "MU00525-32.768K" XTAL_MU00525_NDK 11770,5645 r0 top
X2 "NSC5004D-25M" NSC5004D-25M 10845,5670 r0 top
X3 "NSC5004A-24M" NSC5004D-25M 11665,9270 r0 top

## Footprints (in the part's own frame and the unit in brackets; to place one, negate y for a bottom-side part, rotate by r counter-clockwise, add the part's x,y. Pads: shape width x height; smd on the part's side, far side on the other; paste and mask are expansions set on the pad)
5040500991 [mil]
  rect 26x41 smd: 1(236.22,-119.76) 2(177.17,-119.76) 3(118.11,-119.76) 4(59.06,-119.76) 5(0,-119.76) 6(-59.06,-119.76) 7(-118.11,-119.76) 8(-177.17,-119.76) 9(-236.22,-119.76)
  rect 51x73 smd: 10(-326.97,84.57) 11(326.97,84.57)
  silkscreen extent -344,-150 344,125, body extent -354,-129 357,124, height 79
61301021121 [mm] "Pin Header, pitch 2.54 mm, THT, Vertical, dual row, 10p"
  rrect50% 1.65x1.65 hole 1.1: 1(-5.08,-1.27)
  round 1.65 hole 1.1: 2(-5.08,1.27) 3(-2.54,-1.27) 4(-2.54,1.27) 5(0,-1.27) 6(0,1.27) 7(2.54,-1.27) 8(2.54,1.27) 9(5.08,-1.27) 10(5.08,1.27)
  silkscreen extent -7.08,-2.62 6.5,2.62, body extent -6.35,-2.54 6.35,2.54, height 8.59
009159010061911 [mm]
  rect 1x4 smd: 1(0,0) 2(2,0) 3(4,0) 4(6,0) 5(8,0)
  rect 1x4 smd far side: 6(0,0) 7(2,0) 8(4,0) 9(6,0) 10(8,0)
  silkscreen extent -0.7,-2.2 8.7,2.6
BGA153C50P14X14_1150X1300X80 [mm]
  round 0.29 smd: A1(-3.25,3.25) A2(-2.75,3.25) A3(-2.25,3.25) A4(-1.75,3.25) A5(-1.25,3.25) A6(-0.75,3.25) A7(-0.25,3.25) A8(0.25,3.25) A9(0.75,3.25) A10(1.25,3.25) A11(1.75,3.25) A12(2.25,3.25) A13(2.75,3.25) A14(3.25,3.25) B1(-3.25,2.75) B2(-2.75,2.75) B3(-2.25,2.75) B4(-1.75,2.75) B5(-1.25,2.75) B6(-0.75,2.75) B7(-0.25,2.75) B8(0.25,2.75) B9(0.75,2.75) B10(1.25,2.75) B11(1.75,2.75) B12(2.25,2.75) B13(2.75,2.75) B14(3.25,2.75) C1(-3.25,2.25) C2(-2.75,2.25) C3(-2.25,2.25) C4(-1.75,2.25) C5(-1.25,2.25) C6(-0.75,2.25) C7(-0.25,2.25) C8(0.25,2.25) C9(0.75,2.25) C10(1.25,2.25) C11(1.75,2.25) C12(2.25,2.25) C13(2.75,2.25) C14(3.25,2.25) D1(-3.25,1.75) D2(-2.75,1.75) D3(-2.25,1.75) D4(-1.75,1.75) D12(2.25,1.75) D13(2.75,1.75) D14(3.25,1.75) E1(-3.25,1.25) E2(-2.75,1.25) E3(-2.25,1.25) E5(-1.25,1.25) E6(-0.75,1.25) E7(-0.25,1.25) E8(0.25,1.25) E9(0.75,1.25) E10(1.25,1.25) E12(2.25,1.25) E13(2.75,1.25) E14(3.25,1.25) F1(-3.25,0.75) F2(-2.75,0.75) F3(-2.25,0.75) F5(-1.25,0.75) F10(1.25,0.75) F12(2.25,0.75) F13(2.75,0.75) F14(3.25,0.75) G1(-3.25,0.25) G2(-2.75,0.25) G3(-2.25,0.25) G5(-1.25,0.25) G10(1.25,0.25) G12(2.25,0.25) G13(2.75,0.25) G14(3.25,0.25) H1(-3.25,-0.25) H2(-2.75,-0.25) H3(-2.25,-0.25) H5(-1.25,-0.25) H10(1.25,-0.25) H12(2.25,-0.25) H13(2.75,-0.25) H14(3.25,-0.25) J1(-3.25,-0.75) J2(-2.75,-0.75) J3(-2.25,-0.75) J5(-1.25,-0.75) J10(1.25,-0.75) J12(2.25,-0.75) J13(2.75,-0.75) J14(3.25,-0.75) K1(-3.25,-1.25) K2(-2.75,-1.25) K3(-2.25,-1.25) K5(-1.25,-1.25) K6(-0.75,-1.25) K7(-0.25,-1.25) K8(0.25,-1.25) K9(0.75,-1.25) K10(1.25,-1.25) K12(2.25,-1.25) K13(2.75,-1.25) K14(3.25,-1.25) L1(-3.25,-1.75) L2(-2.75,-1.75) L3(-2.25,-1.75) L12(2.25,-1.75) L13(2.75,-1.75) L14(3.25,-1.75) M1(-3.25,-2.25) M2(-2.75,-2.25) M3(-2.25,-2.25) M4(-1.75,-2.25) M5(-1.25,-2.25) M6(-0.75,-2.25) M7(-0.25,-2.25) M8(0.25,-2.25) M9(0.75,-2.25) M10(1.25,-2.25) M11(1.75,-2.25) M12(2.25,-2.25) M13(2.75,-2.25) M14(3.25,-2.25) N1(-3.25,-2.75) N2(-2.75,-2.75) N3(-2.25,-2.75) N4(-1.75,-2.75) N5(-1.25,-2.75) N6(-0.75,-2.75) N7(-0.25,-2.75) N8(0.25,-2.75) N9(0.75,-2.75) N10(1.25,-2.75) N11(1.75,-2.75) N12(2.25,-2.75) N13(2.75,-2.75) N14(3.25,-2.75) P1(-3.25,-3.25) P2(-2.75,-3.25) P3(-2.25,-3.25) P4(-1.75,-3.25) P5(-1.25,-3.25) P6(-0.75,-3.25) P7(-0.25,-3.25) P8(0.25,-3.25) P9(0.75,-3.25) P10(1.25,-3.25) P11(1.75,-3.25) P12(2.25,-3.25) P13(2.75,-3.25) P14(3.25,-3.25)
  silkscreen extent -5.85,-6.5 5.75,6.6, body extent -5.75,-6.5 5.75,6.5, height 0.8
CAP_C_1608X80 [mm] "Chip Capacitor, 2-Leads, Body 1.60x0.80mm, IPC Medium Density"
  rrect50% 0.85x0.95 smd: 1(-0.775,0) 2(0.775,0)
  silkscreen extent -0.9,-0.7 0.9,0.7, body extent -0.87,-0.48 0.87,0.48, height 0.85
CAP_C_1608X80_L [mm] "Chip Capacitor, 2-Leads, Body 1.60x0.80mm, IPC High Density"
  rrect50% 0.75x0.95 smd: 1(-0.725,0) 2(0.725,0)
  silkscreen extent -0.2,-0.5 0.2,0.5, body extent -0.87,-0.48 0.87,0.48, height 0.85
CAP_MP_1608X90 [mm] "Molded Capacitor, 2-Leads, Body 1.60x0.85mm, IPC Medium Density"
  rrect50% 1.1x1 smd mask+0.102: 1(-0.85,0) 2(0.85,0)
  silkscreen extent -2.1,-0.7 1.1,0.7, body extent -0.8,-0.43 0.8,0.43, height 1
CONN_5040500591_MOL [mil]
  rect 26x41 smd paste+0 mask+0: 1(118.11,-119.76) 2(59.06,-119.76) 3(0,-119.76) 4(-59.06,-119.76) 5(-118.11,-119.76)
  rect 51x73 smd paste-36.5 mask-36.5: 6(-208.86,84.57) 7(208.86,84.57)
  silkscreen extent -226,-135 266,125, body extent -237,-134 237,120, height 79
CONV_TPS5430DDAR [mm]
  rrect10% 1.55x0.6 smd mask+0: 1(-2.7,1.905) 2(-2.7,0.635) 3(-2.7,-0.635) 4(-2.7,-1.905) 5(2.7,-1.905) 6(2.7,-0.635) 7(2.7,0.635) 8(2.7,1.905)
  rect 2.95x4.9 smd paste-3 mask+0: 9(0,0)
  round 0.3 hole 0.2 mask+0: 10(-0.65,1.95) 11(0.65,1.95) 12(-0.65,0.65) 13(0.65,0.65) 14(-0.65,-0.65) 15(0.65,-0.65) 16(-0.65,-1.95) 17(0.65,-1.95)
  silkscreen extent -4.17,-2.52 1.95,2.52, body extent -3,-2.45 3,2.45, height 1.7
DCQ0006A-MFG [mm]
  rect 2.05x0.65 smd paste+0 mask+0: 1(-3,2.54) 2(-3,1.27) 3(-3,0) 4(-3,-1.27) 5(-3,-2.54)
  rect 2.05x3.2 smd paste-1.587 mask+0: 6(3,0)
  round 0.5 / inner round 1.524 / far side round 0.5 hole 0.203 paste-2539.97 mask-0.241: 7(3,1.35) 8(3,-1.35) 9(3.775,0) 10(2.225,0)
  silkscreen extent -4.72,-3.3 1.8,3.3, body extent -3.55,-3.25 3.55,3.25, height 1.66
DS90LV011AQ-Q1 [mm]
  rrect50% 1.21x0.59 smd: 1(-1.255,0.95) 2(-1.255,0) 3(-1.255,-0.95) 4(1.255,-0.95) 5(1.255,0.95)
  silkscreen extent -2.51,-1.45 0.8,1.45, body extent -1.4,-1.45 1.4,1.45, height 1.45
ESQ-126-14-G-D [mm]
  rect 1.53x1.53 / inner round 1.53 / far side rect 1.53x1.53 hole 1.02: 01(31.75,-1.27)
  round 1.53 hole 1.02: 02(31.75,1.27) 03(29.21,-1.27) 04(29.21,1.27) 05(26.67,-1.27) 06(26.67,1.27) 07(24.13,-1.27) 08(24.13,1.27) 09(21.59,-1.27) 10(21.59,1.27) 11(19.05,-1.27) 12(19.05,1.27) 13(16.51,-1.27) 14(16.51,1.27) 15(13.97,-1.27) 16(13.97,1.27) 17(11.43,-1.27) 18(11.43,1.27) 19(8.89,-1.27) 20(8.89,1.27) 21(6.35,-1.27) 22(6.35,1.27) 23(3.81,-1.27) 24(3.81,1.27) 25(1.27,-1.27) 26(1.27,1.27) 27(-1.27,-1.27) 28(-1.27,1.27) 29(-3.81,-1.27) 30(-3.81,1.27) 31(-6.35,-1.27) 32(-6.35,1.27) 33(-8.89,-1.27) 34(-8.89,1.27) 35(-11.43,-1.27) 36(-11.43,1.27) 37(-13.97,-1.27) 38(-13.97,1.27) 39(-16.51,-1.27) 40(-16.51,1.27) 41(-19.05,-1.27) 42(-19.05,1.27) 43(-21.59,-1.27) 44(-21.59,1.27) 45(-24.13,-1.27) 46(-24.13,1.27) 47(-26.67,-1.27) 48(-26.67,1.27) 49(-29.21,-1.27) 50(-29.21,1.27) 51(-31.75,-1.27) 52(-31.75,1.27)
  silkscreen extent -33.28,-2.47 34.02,2.47, body extent -33.27,-2.67 33.27,2.41, height 11.2
FLIPCHIP4_USBUL_STM [mil]
  round 10 smd paste+0 mask+0: A1(-7.87,7.87) A2(7.87,7.88) B1(-7.87,-7.88) B2(7.87,-7.87)
  Keep-Out Layer region: -33.25,-33.25 -33.25,33.25 33.25,33.25 33.25,-33.25
  body extent -16,-16 16,16, height 26
FP-4-1437565-1-MFG [mm]
  rect 2.1x1.38 smd paste+0 mask+0: 1(-4.55,2.24) 2(4.55,2.24) 3(-4.55,-2.24) 4(4.55,-2.24)
  silkscreen extent -6.27,-3.15 3.15,3.15
FP-BLM03-0_03-d0_3-IPC_C [mil]
  rect 13.94x10.34 smd paste+0 mask+0: 1(-10.01,0) 2(10.01,0)
  silkscreen extent -17,-22 17,22
FP-BLM18-0_15-t0_8-IPC_A [mil]
  rect 51.42x41.66 smd paste+0 mask+0: 1(-30.55,0) 2(30.55,0)
  silkscreen extent -56,-37 56,37, body extent -76,-41 76,41, height 10
FP-TSW-102-07-G-S-MFG [mm]
  rect 1.57x1.57 hole 1.02 paste-2539.97 mask+0: 1(-1.27,0)
  round 1.57 hole 1.02 paste-2539.97 mask+0: 2(1.27,0)
  silkscreen extent -3.42,-1.34 2.73,1.34, body extent -2.83,-1.44 2.83,1.44, height 0.25